# EAGLE board CAA-NMC_variants (EAGLE 9.2.2)
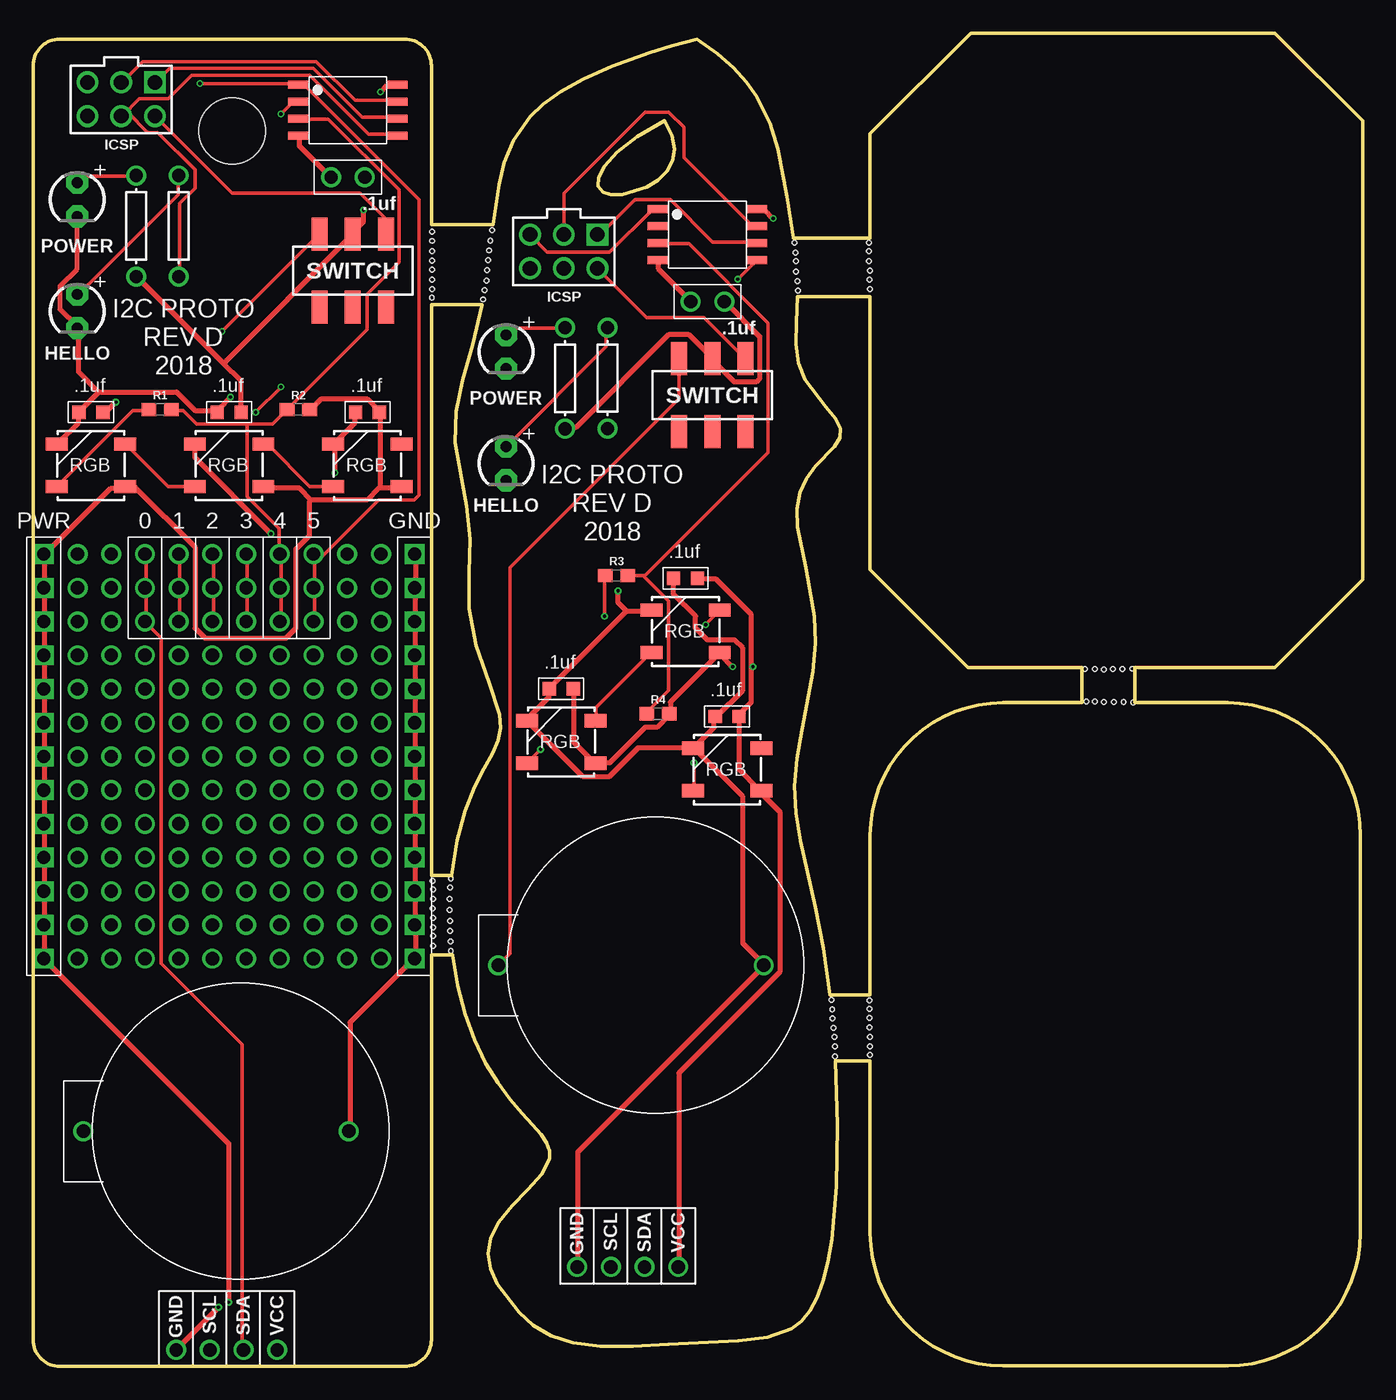
[diagram p0: board, top side]
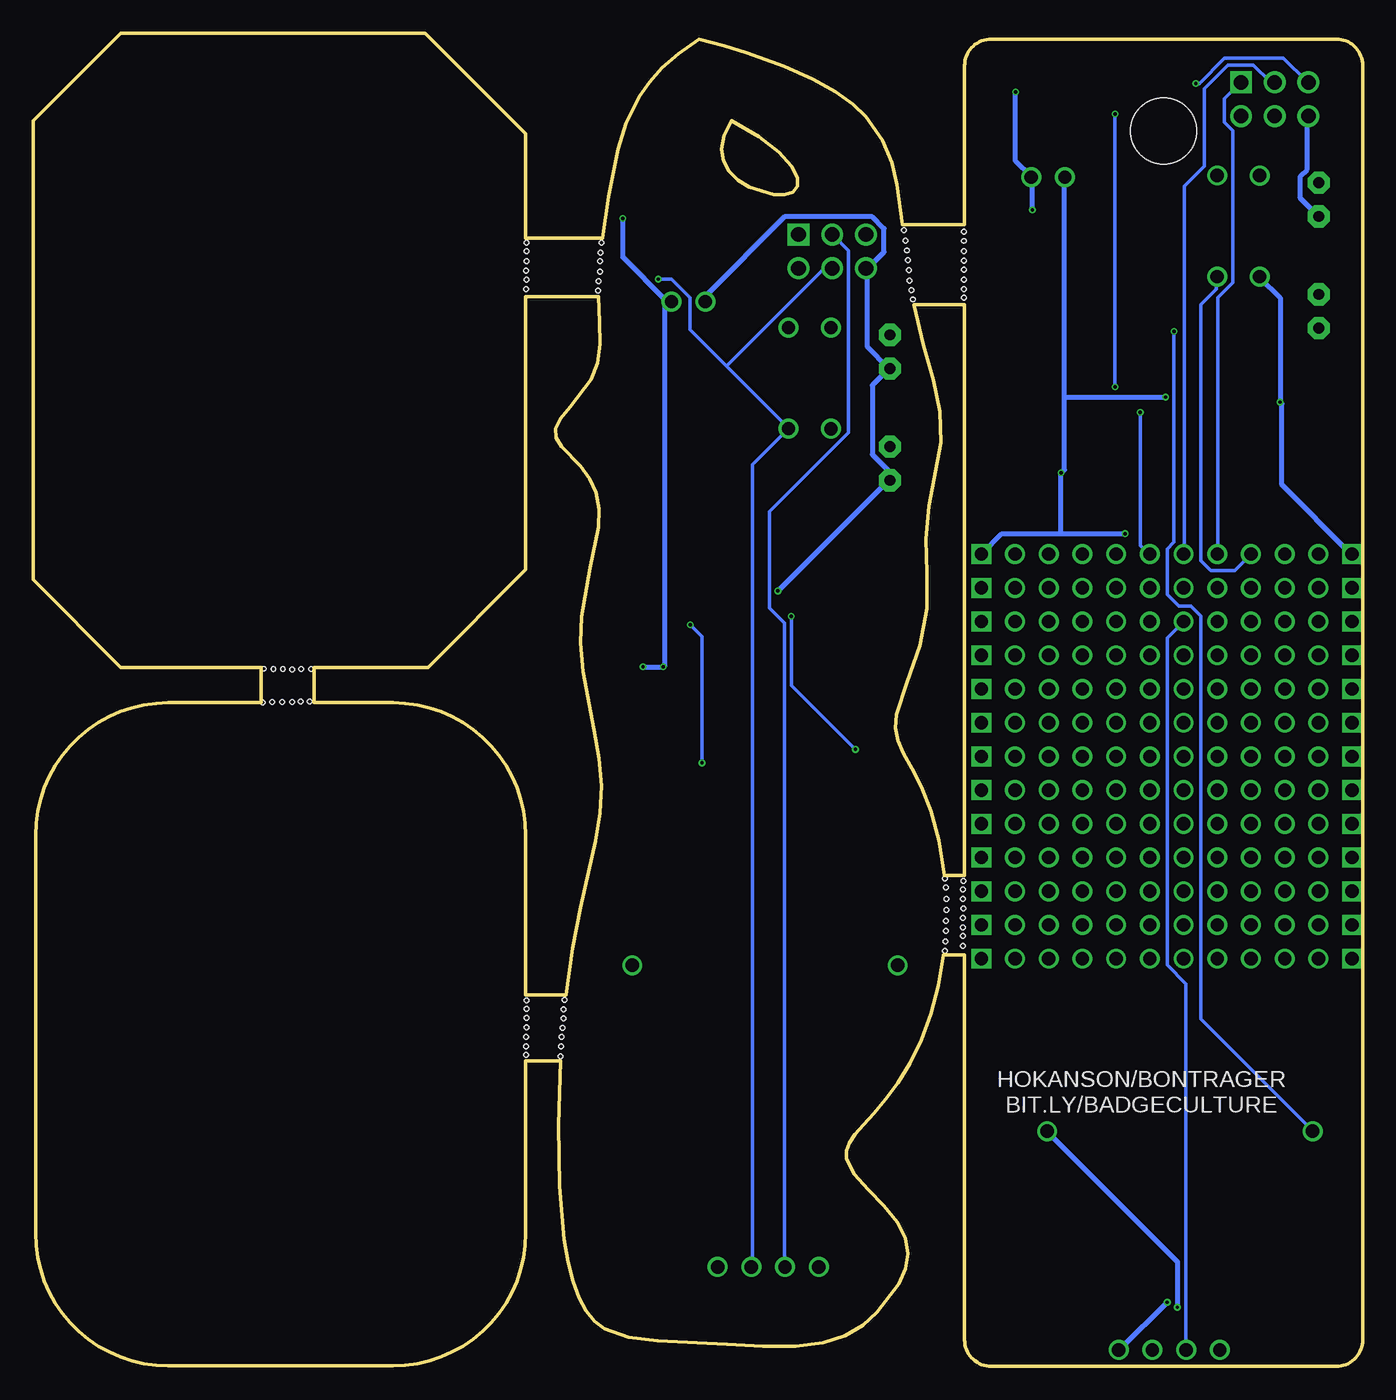
[diagram p1: board, bottom side, seen from below]

Size 100.18 x 100.44 mm. Coordinates in mm from the lower left corner, seen from the top.
Outline: 70.64,100.44 63.06,92.86 63.06,85 57.27,85 56.81,88.12 56.11,91.71 55.5,93.66 54.48,95.71 53.74,96.76 52.78,97.83 51.56,98.91 50,100 48.12,99.48 46.44,98.97 43.62,97.96 41.42,96.98 39.72,96.02 38.42,95.08 37.44,94.16 36.18,92.38 35.49,90.68 35.1,89.05 34.66,86 30,86 30,98 arc90 28,100 2,100 arc90 0,98 0,2 arc90 2,0 28,0 arc90 30,2 30,31 31.61,31 31.98,28.72 32.54,26.56 33.26,24.59 34.1,22.84 35.02,21.35 35.95,20.1 36.84,19.06 37.62,18.2 38.25,17.47 38.69,16.83 38.9,16.24 38.9,15.67 38.33,14.52 37.25,13.31 36.06,12.09 35.08,10.86 34.46,9.66 34.27,8.49 34.46,7.35 34.96,6.22 36.59,4.06 37.67,3.1 39,2.31 40.67,1.78 42.75,1.53 45.2,1.52 47.89,1.65 53.12,1.94 55.33,2.2 57.13,2.85 57.87,3.41 58.52,4.17 59.06,5.17 59.52,6.4 59.88,7.87 60.17,9.57 60.52,13.58 60.6,18.16 60.44,23 63.06,23 63.06,10.03 arc90 73.06,0.03 90,0.03 arc90 100,10.03 100,40 arc90 90,50 83,50 83,52.65 93.57,52.65 100.18,59.26 100.18,93.83 93.57,100.44 70.64,100.44
Outline: 47.55,93.83 48.13,92.71 48.33,91.72 48.18,90.83 47.74,90.05 47.06,89.39 46.22,88.85 44.37,88.27 43.55,88.26 42.92,88.47 42.58,88.9 42.59,89.56 43.04,90.42 43.99,91.46 45.48,92.63 47.55,93.83
Outline: 70.43,52.65 79,52.65 79,50 73.06,50 arc90 63.06,40 63.06,28 60.02,28 59.53,31.49 58.95,34.58 58.35,37.26 57.82,39.59 57.47,41.7 57.37,43.74 57.54,45.81 57.91,47.95 58.74,52.35 58.93,54.49 58.88,56.51 58.23,60.14 57.6,63.24 57.55,64.6 57.77,65.81 58.25,66.89 58.93,67.81 60.37,69.31 60.79,69.98 60.82,70.67 60.44,71.42 59.73,72.27 58.14,74.33 57.66,75.58 57.48,77 57.52,78.66 57.58,80.61 63.06,80.61 63.06,60.02 70.43,52.65
Outline: 30,80 33.81,80 33.09,76.93 32.35,74.29 31.85,71.91 31.8,69.61 32.67,64.8 32.9,62.31 32.83,59.78 32.85,57.11 33.38,54.3 34.36,51.52 35.14,49.12 35.22,48.1 35.04,47.15 34.61,46.17 33.98,45.05 33.26,43.64 32.54,41.85 31.93,39.62 31.53,37 30,37 30,80
Copper layers (1*16): Top 0.035559375mm / dielectric 1.6mm / Bottom 0.035559375mm
Design rules "oshpark-2layer": minimum track width 6mil, minimum drill 10mil, track to track 6mil, track to pad 6mil, pad to pad 6mil, via to via 6mil, smd to smd 6mil, copper to edge 15mil, drill to drill 6mil, minimum pad ring 5mil, minimum via ring 5mil, stop-mask expansion 2.5mil, vias tented up to drill 0mil, thermal gap 10mil
Net classes: 0 default: width 0.254 mm, clearance 0.254 mm; 1 VCC: width 0.381 mm, clearance 0.254 mm; 2 GND: width 0.381 mm, clearance 0.254 mm
Holes 5 mm at 15,93.07
Holes 0.35 mm at 30.07,85.48 30.07,84.79 30.05,84.03 30.07,83.31 30.07,82.63 30.07,81.88 30.05,81.17 30.04,80.51 34.57,85.59 34.44,84.83 34.33,84.08 34.27,83.35 34.19,82.6 34.16,81.79 34.01,81.09 33.89,80.39 30.1,36.58 30.12,35.93 30.12,35.21 30.1,34.5 30.12,33.78 30.12,33.08 30.12,32.41 30.13,31.68 31.47,31.28 31.44,32 31.41,32.81 31.41,33.57 31.37,34.4 31.36,35.23 31.41,36.07 31.47,36.76 60.14,27.59 60.2,26.89 60.22,26.22 60.3,25.51 60.36,24.81 60.41,24.09 60.42,23.36 63,27.58 63,26.92 63,26.25 63.02,25.54 63.05,24.81 63.05,24.12 63.05,23.45 79.34,50.09 80.01,50.09 80.68,50.06 81.41,50.06 82.16,50.04 82.87,50.03 82.81,52.56 82.08,52.54 81.36,52.52 80.68,52.51 79.99,52.52 79.25,52.52 57.35,84.65 57.43,83.92 57.47,83.27 57.48,82.49 57.58,81.75 57.61,81.04 62.99,84.67 62.99,84.01 62.99,83.28 63.03,82.57 63.02,81.87 63.03,81.17

## Footprints (pad centres in the part's own frame; a part is rotated, then mirrored left to right if it is on the bottom)
WS2812B = smd 1 x 1: CAP1 -0.9,4; CAP2 0.9,4 | smd 1.651 x 1: DI -2.577,-1.6; DO 2.577,1.6; GND -2.577,1.6; VCC 2.577,-1.6
LED3MM = drill 0.813 pad 1.676 octagon: NEG 1.27,0; POS -1.27,0
SOT127P798X216-8N = smd 1.5 x 0.6: GND -3.75,-1.905; PB0 3.75,-1.905; PB1 3.75,-0.635; PB2 3.75,0.635; PB3 -3.75,0.635; PB4 -3.75,-0.635; PB5 -3.75,1.905; VCC 3.75,1.905
HDRV6W64P254_2X3_762X508X868P = drill 1.1 pad 1.65: 0/MOSI/SDA 0,1.27; 2/SCK/SCL 0,3.81; 5/RST -2.54,3.81; GND -2.54,1.27; VCC 2.54,1.27 | drill 1.1 pad 1.65 square: 1/MISO 2.54,3.81
0603 = smd 1.1 x 1: 1 -0.85,0; 2 0.85,0
PROTO = drill 1: 0A -6.35,30.48; 0B -6.35,27.94; 0C -6.35,25.4; 1A -3.81,30.48; 1B -3.81,27.94; 1C -3.81,25.4; 2A -1.27,30.48; 2B -1.27,27.94; 2C -1.27,25.4; 3A 1.27,30.48; 3B 1.27,27.94; 3C 1.27,25.4; 4A 3.81,30.48; 4B 3.81,27.94; 4C 3.81,25.4; 5A 6.35,30.48; 5B 6.35,27.94; 5C 6.35,25.4; VSTRIP1 -8.89,22.86; VSTRIP2 -8.89,20.32; VSTRIP3 -8.89,17.78; VSTRIP4 -8.89,15.24; VSTRIP5 -8.89,12.7; VSTRIP6 -6.35,22.86; VSTRIP7 -6.35,20.32; VSTRIP8 -6.35,17.78; VSTRIP9 -6.35,15.24; VSTRIP10 -6.35,12.7; VSTRIP11 -11.43,10.16; VSTRIP12 -11.43,7.62; VSTRIP13 -11.43,5.08; VSTRIP14 -11.43,2.54; VSTRIP15 -11.43,0; VSTRIP16 -3.81,22.86; VSTRIP17 -3.81,20.32; VSTRIP18 -3.81,17.78; VSTRIP19 -3.81,15.24; VSTRIP20 -3.81,12.7; VSTRIP21 -1.27,22.86; VSTRIP22 -1.27,20.32; VSTRIP23 -1.27,17.78; VSTRIP24 -1.27,15.24; VSTRIP25 -1.27,12.7; VSTRIP26 1.27,22.86; VSTRIP27 1.27,20.32; VSTRIP28 1.27,17.78; VSTRIP29 1.27,15.24; VSTRIP30 1.27,12.7; VSTRIP31 3.81,22.86; VSTRIP32 3.81,20.32; VSTRIP33 3.81,17.78; VSTRIP34 3.81,15.24; VSTRIP35 3.81,12.7; VSTRIP36 6.35,22.86; VSTRIP37 6.35,20.32; VSTRIP38 6.35,17.78; VSTRIP39 6.35,15.24; VSTRIP40 6.35,12.7; VSTRIP41 8.89,22.86; VSTRIP42 8.89,20.32; VSTRIP43 8.89,17.78; VSTRIP44 8.89,15.24; VSTRIP45 8.89,12.7; VSTRIP46 11.43,22.86; VSTRIP47 11.43,20.32; VSTRIP48 11.43,17.78; VSTRIP49 11.43,15.24; VSTRIP50 11.43,12.7; VSTRIP51 -11.43,22.86; VSTRIP52 -11.43,20.32; VSTRIP53 -11.43,17.78; VSTRIP54 -11.43,15.24; VSTRIP55 -8.89,10.16; VSTRIP56 -8.89,7.62; VSTRIP57 -8.89,5.08; VSTRIP58 -8.89,2.54; VSTRIP59 -8.89,0; VSTRIP60 -11.43,12.7; VSTRIP61 -8.89,30.48; VSTRIP62 -8.89,27.94; VSTRIP63 -8.89,25.4; VSTRIP64 -11.43,30.48; VSTRIP65 -11.43,27.94; VSTRIP66 -11.43,25.4; VSTRIP67 8.89,30.48; VSTRIP68 8.89,27.94; VSTRIP69 8.89,25.4; VSTRIP70 11.43,30.48; VSTRIP71 11.43,27.94; VSTRIP72 11.43,25.4; VSTRIP75 -6.35,10.16; VSTRIP76 -6.35,7.62; VSTRIP77 -6.35,5.08; VSTRIP78 -6.35,2.54; VSTRIP79 -6.35,0; VSTRIP95 -3.81,10.16; VSTRIP96 -3.81,7.62; VSTRIP97 -3.81,5.08; VSTRIP98 -3.81,2.54; VSTRIP99 -3.81,0; VSTRIP115 -1.27,10.16; VSTRIP116 -1.27,7.62; VSTRIP117 -1.27,5.08; VSTRIP118 -1.27,2.54; VSTRIP119 -1.27,0; VSTRIP135 1.27,10.16; VSTRIP136 1.27,7.62; VSTRIP137 1.27,5.08; VSTRIP138 1.27,2.54; VSTRIP139 1.27,0; VSTRIP155 3.81,10.16; VSTRIP156 3.81,7.62; VSTRIP157 3.81,5.08; VSTRIP158 3.81,2.54; VSTRIP159 3.81,0; VSTRIP175 6.35,10.16; VSTRIP176 6.35,7.62; VSTRIP177 6.35,5.08; VSTRIP178 6.35,2.54; VSTRIP179 6.35,0; VSTRIP195 8.89,10.16; VSTRIP196 8.89,7.62; VSTRIP197 8.89,5.08; VSTRIP198 8.89,2.54; VSTRIP199 8.89,0; VSTRIP215 11.43,10.16; VSTRIP216 11.43,7.62; VSTRIP217 11.43,5.08; VSTRIP218 11.43,2.54; VSTRIP219 11.43,0 | drill 1 square: GND0 13.97,0; GND1 13.97,2.54; GND2 13.97,5.08; GND3 13.97,7.62; GND4 13.97,10.16; GND5 13.97,12.7; GND6 13.97,15.24; GND7 13.97,17.78; GND8 13.97,20.32; GND9 13.97,22.86; GND10 13.97,25.4; GND11 13.97,27.94; GND12 13.97,30.48; PWR0 -13.97,0; PWR1 -13.97,2.54; PWR2 -13.97,5.08; PWR3 -13.97,7.62; PWR4 -13.97,10.16; PWR5 -13.97,12.7; PWR6 -13.97,15.24; PWR7 -13.97,17.78; PWR8 -13.97,20.32; PWR9 -13.97,22.86; PWR10 -13.97,25.4; PWR11 -13.97,27.94; PWR12 -13.97,30.48
THRU-CR-HOLDER = drill 1: GND 8.15,0; VBAT -11.85,0
1X01 = drill 1: P$1 0,0
DECOUPLING_CAP = drill 1: P$1 0,0; P$2 2.54,0
AXIAL-0.3 = drill 1: P$3 -3.81,0; P$4 3.81,0
SMT-SWITCH = smd 1.2 x 2.5: 1 -2.5,-2.75; 2 0,-2.75; 3 2.5,-2.75; 4 -2.5,2.75; 5 0,2.75; 6 2.5,2.75

## Placement (x,y rotation side)
D1  WS2812B  [WS2812B]  4.36,67.89 0 top
D2  WS2812B  [WS2812B]  14.77,67.89 0 top
D3  WS2812B  [WS2812B]  25.19,67.89 0 top
D4  WS2812B  [WS2812B]  39.78,47.05 0 top
D5  WS2812B  [WS2812B]  49.15,55.38 0 top
D6  WS2812B  [WS2812B]  52.28,44.96 0 top
HELLO  LED3MM  [LED3MM]  3.32,79.49 270 top
HELLO1  LED3MM  [LED3MM]  35.62,68.02 270 top
IC1  ATTINY85-20SU  [SOT127P798X216-8N]  23.71,94.64 0 top
IC2  ATTINY85-20SU  [SOT127P798X216-8N]  50.8,85.26 0 top
J1  M20-9980346  [HDRV6W64P254_2X3_762X508X868P]  6.63,92.93 0 top
J2  M20-9980346  [HDRV6W64P254_2X3_762X508X868P]  39.98,81.46 0 top
POWER  LED3MM  [LED3MM]  3.32,87.91 270 top
POWER1  LED3MM  [LED3MM]  35.62,76.44 270 top
R1  470  [0603]  9.56,72.08 0 top
R2  10k  [0603]  19.98,72.08 0 top
R3  470  [0603]  43.95,59.58 0 top
R4  10k  [0603]  47.07,49.16 0 top
U$1  PROTO  [PROTO]  14.77,30.71 0 top
U$3  THRU-CR-HOLDER  [THRU-CR-HOLDER]  15.63,17.71 0 top
U$4  GND  [1X01]  40.99,7.49 180 top
U$5  VCC  [1X01]  48.61,7.49 90 top
U$6  SDA  [1X01]  46.07,7.49 0 top
U$7  SCL  [1X01]  43.53,7.49 0 top
U$8  DECOUPLING_CAP  [DECOUPLING_CAP]  49.53,80.22 0 top
U$9  RESISTOR  [AXIAL-0.3]  40.07,74.45 270 top
U$10  RESISTOR  [AXIAL-0.3]  43.27,74.45 270 top
U$11  SMT-SWITCH  [SMT-SWITCH]  51.17,73.17 0 top
U$14  THRU-CR-HOLDER  [THRU-CR-HOLDER]  46.89,30.22 0 top
U$71  GND  [1X01]  10.77,1.23 180 top
U$72  SDA  [1X01]  15.85,1.23 0 top
U$73  SCL  [1X01]  13.31,1.23 0 top
U$74  VCC  [1X01]  18.39,1.23 90 top
U$123  DECOUPLING_CAP  [DECOUPLING_CAP]  22.44,89.6 0 top
U$126  RESISTOR  [AXIAL-0.3]  7.77,85.91 270 top
U$127  RESISTOR  [AXIAL-0.3]  10.97,85.92 270 top
U$145  SMT-SWITCH  [SMT-SWITCH]  24.08,82.55 0 top

## Library data of the parts
D1-D6 = BadgeParts; PROD_ID: DIO-12503
HELLO HELLO1 POWER POWER1 U$1 U$3-U$11 U$14 U$71-U$74 U$123 U$126 U$127 U$145 = BadgeParts
IC1 IC2 = BadgeParts; ARROW_PART_NUMBER: ATTINY85-20SU; ARROW_PRICE/STOCK: https://www.arrow.com/en/products/attiny85-20su/microchip-technology; DESCRIPTION: MICROCHIP - ATTINY85-20SU - MICROCONTROLLER MCU, 8 BIT, ATTINY, 20MHZ, SOIC-8; HEIGHT: 2.16mm; MANUFACTURER_NAME: Microchip; MANUFACTURER_PART_NUMBER: ATTINY85-20SU; RS_PART_NUMBER: 1331674; RS_PRICE/STOCK: http://uk.rs-online.com/web/p/products/1331674
J1 J2 = BadgeParts; ARROW_PART_NUMBER: M20-9980346; ARROW_PRICE/STOCK: http://uk.rs-online.com/web/p/products/7457046P; DESCRIPTION: 03+03 DIL Vertical Pin Header HARWIN M20 Series, 2.54mm Pitch 6 Way 2 Row Straight PCB Header, Solder Termination, 3A; HEIGHT: 8.68mm; MANUFACTURER_NAME: HARWIN; MANUFACTURER_PART_NUMBER: M20-9980346; RS_PART_NUMBER: 7457046P; RS_PRICE/STOCK: http://uk.rs-online.com/web/p/products/7457046P
R1 R3 = SparkFun-Resistors; PROD_ID: RES-07869
R2 R4 = SparkFun-Resistors; PROD_ID: RES-00824

## Nets
GND [GND]: D1.CAP1 D1.GND D2.CAP1 D2.GND D3.CAP1 D3.GND HELLO.NEG IC1.GND J1.GND POWER.NEG U$1.GND0 U$1.GND1 U$1.GND2 U$1.GND3 U$1.GND4 U$1.GND5 U$1.GND6 U$1.GND7 U$1.GND8 U$1.GND9 U$1.GND10 U$1.GND11 U$1.GND12 U$3.GND U$71.P$1 U$123.P$1
GND1 [GND]: D4.CAP1 D4.GND D5.CAP1 D5.GND D6.CAP1 D6.GND HELLO1.NEG IC2.GND J2.GND POWER1.NEG U$4.P$1 U$8.P$1 U$14.GND
N$1: POWER.POS U$126.P$3
N$2: HELLO.POS U$127.P$3
N$3: D1.DO D2.DI
N$4: D2.DO D3.DI
N$5: D1.DI R1.1
N$6: POWER1.POS U$9.P$3
N$7: HELLO1.POS U$10.P$3
N$8: D4.DO D5.DI
N$9: D5.DO D6.DI
N$10: D4.DI R3.1
PB0: IC1.PB0 J1.0/MOSI/SDA U$1.0A U$1.0B U$1.0C U$72.P$1 U$127.P$4
PB1: IC1.PB1 J1.1/MISO U$1.1A U$1.1B U$1.1C
PB2: IC1.PB2 J1.2/SCK/SCL U$1.2A U$1.2B U$1.2C U$73.P$1
PB3: IC1.PB3 U$1.3A U$1.3B U$1.3C
PB4: IC1.PB4 R1.2 R2.1 U$1.4A U$1.4B U$1.4C
PB5: IC1.PB5 J1.5/RST U$1.5A U$1.5B U$1.5C
PB6: IC2.PB0 J2.0/MOSI/SDA U$6.P$1 U$10.P$4
PB7: IC2.PB3
PB8: IC2.PB4 R3.2 R4.1
PB9: IC2.PB2 J2.2/SCK/SCL U$7.P$1
PB10: IC2.PB5 J2.5/RST
PB11: IC2.PB1 J2.1/MISO
VBAT: U$3.VBAT U$145.4
VBAT1: U$11.4 U$14.VBAT
VCC [VCC]: D1.CAP2 D1.VCC D2.CAP2 D2.VCC D3.CAP2 D3.VCC IC1.VCC R2.2 U$1.PWR0 U$1.PWR1 U$1.PWR2 U$1.PWR3 U$1.PWR4 U$1.PWR5 U$1.PWR6 U$1.PWR7 U$1.PWR8 U$1.PWR9 U$1.PWR10 U$1.PWR11 U$1.PWR12 U$74.P$1 U$123.P$2 U$126.P$4 U$145.5
VCC1 [VCC]: D4.CAP2 D4.VCC D5.CAP2 D5.VCC D6.CAP2 D6.VCC IC2.VCC R4.2 U$5.P$1 U$8.P$2 U$9.P$4 U$11.5
VUSB: J1.VCC U$145.6
VUSB1: J2.VCC U$11.6

## Tracks (layer width: path | path; a pad name or v marks a point on that pad's centre or on a via)
GND  (via drill 0.25)
  Top 0.381: D1.GND 1.91,69.6 3.43,71.12 3.43,71.88 D1.CAP1 3.56,72.01 4.95,73.41 | 4.95,73.41 10.79,73.41 12.19,72.01 13.84,72.01 D2.CAP1 13.97,72.14 v14.86,73.03 | 4.95,73.41 3.43,74.93 3.43,78.11 HELLO.NEG 3.3,78.36 2.03,79.63 2.03,81.41 3.3,82.68 3.3,86.61 POWER.NEG | v13.97,4.45 10.79,1.27 U$71.P$1 | IC1.GND 20.07,92.71 20.07,91.95 22.35,89.66 U$123.P$1 | D3.CAP1 24.26,71.88 24.26,71.12 22.73,69.6 D3.GND 22.73,69.34 v22.73,67.31 | v17.91,62.74 12.19,68.45 12.19,69.47 D2.GND | U$1.GND12 28.83,61.09 28.83,58.8 U$1.GND11 28.83,58.55 28.83,56.26 U$1.GND10 28.83,56.01 28.83,53.72 U$1.GND9 28.83,53.47 28.83,51.18 U$1.GND8 28.83,50.93 28.83,48.64 U$1.GND7 28.83,48.39 28.83,46.1 U$1.GND6 28.83,45.85 28.83,43.56 U$1.GND5 28.83,43.31 28.83,41.02 U$1.GND4 28.83,40.77 28.83,38.48 U$1.GND3 28.83,38.23 28.83,35.94 U$1.GND2 28.83,35.69 28.83,33.4 U$1.GND1 28.83,33.15 28.83,30.73 U$1.GND0 28.57,30.61 23.88,25.91 23.88,17.78 U$3.GND
  Bottom 0.381: J1.GND 4.19,94.11 4.19,90.17 4.7,89.66 4.7,88.01 3.43,86.74 POWER.NEG | v13.97,4.45 13.97,7.87 23.75,17.65 U$3.GND | 22.73,62.74 27.18,62.74 28.7,61.21 U$1.GND12 | 22.73,62.74 v17.91,62.74 | 22.73,62.74 v22.73,67.31 22.48,67.56 22.48,73.03 | 22.48,73.03 22.48,89.53 U$123.P$1 | 22.48,73.03 v14.86,73.03
GND1  (via drill 0.25)
  Top 0.381: IC2.GND 47.12,83.31 47.12,82.68 49.53,80.26 U$8.P$1 | D6.GND 49.78,46.61 51.31,48.13 51.31,48.9 D6.CAP1 51.56,49.02 53.47,50.93 53.47,54.1 52.83,54.74 50.8,54.74 49.91,55.63 49.91,56.52 48.26,58.17 48.26,59.31 D5.CAP1 | 44.7,56.9 46.48,56.9 D5.GND | 44.7,56.9 38.99,51.18 D4.CAP1 38.86,50.93 38.86,50.42 37.21,48.77 D4.GND 37.34,48.51 41.4,44.45 43.43,44.45 45.59,46.61 49.53,46.61 D6.GND | U$4.P$1 41.02,7.49 41.02,16.13 54.99,30.1 U$14.GND 54.99,30.35 53.47,31.88 53.47,42.93 49.91,46.48 D6.GND | v44.07,58.42 44.07,57.53 44.7,56.9
  Bottom 0.381: U$8.P$1 49.53,80.26 49.53,80.64 43.56,86.61 36.96,86.61 36.07,85.72 36.07,83.95 37.21,82.8 J2.GND 37.34,82.68 37.34,76.83 35.69,75.18 POWER1.NEG 35.81,75.06 36.96,73.91 36.96,68.71 35.69,67.44 35.69,66.8 HELLO1.NEG 35.81,66.67 v44.07,58.42
N$1
  Top 0.254: U$126.P$3 7.75,89.66 3.81,89.66 3.43,89.28 POWER.POS
N$2
  Top 0.254: U$127.P$3 10.92,89.66 10.92,88.27 3.43,80.77 HELLO.POS
N$3
  Top 0.254: D2.DI 12.06,66.29 10.16,66.29 6.99,69.47 D1.DO
N$4
  Top 0.254: D3.DI 20.83,66.29 17.65,69.47 17.4,69.47 D2.DO
N$5
  Top 0.254: R1.1 8.64,72.01 7.49,72.01 D1.DI
N$6
  Top 0.254: U$9.P$3 40.01,78.23 36.2,78.23 35.69,77.72 POWER1.POS
N$7
  Top 0.254: U$10.P$3 43.18,78.23 43.18,76.83 35.69,69.34 HELLO1.POS
N$8
  Top 0.254: D4.DO 42.42,48.77 42.42,49.66 46.48,53.72 D5.DI
N$9  (via drill 0.25)
  Top 0.254: v49.78,45.47 49.78,43.43 D6.DI | v50.67,55.88 51.69,56.9 D5.DO
  Bottom 0.254: v49.78,45.47 49.78,54.99 v50.67,55.88
N$10  (via drill 0.25)
  Top 0.254: v43.05,56.52 43.05,59.56 R3.1 | v38.23,46.48 37.21,45.47 D4.DI
  Bottom 0.254: v43.05,56.52 43.05,51.31 v38.23,46.48
PB0
  Top 0.254: IC1.PB0 27.43,92.84 25.27,92.84 20.83,97.28 11.94,97.28 10.16,95.5 8,95.5 6.73,94.23 J1.0/MOSI/SDA 7.11,94.49 8.64,92.96 9.4,92.96 12.19,90.17 12.19,88.77 11.05,87.63 11.05,82.17 U$127.P$4 | U$1.0A 8.51,61.09 8.51,58.67 U$1.0B 8.51,58.55 8.51,56.13 U$1.0C 8.51,56.01 9.65,54.86 9.65,30.35 15.75,24.26 15.75,1.27 U$72.P$1
  Bottom 0.254: U$127.P$4 11.05,82.04 11.05,81.15 12.19,80.01 12.19,60.71 11.43,59.94 9.65,59.94 8.51,61.09 U$1.0A
PB1
  Top 0.254: U$1.1C 11.05,56.13 11.05,58.55 U$1.1B 11.05,58.67 11.05,61.09 U$1.1A | IC1.PB1 27.43,94.11 24.77,94.11 21.08,97.79 10.29,97.79 9.27,96.77 J1.1/MISO
  Bottom 0.254: U$1.1A 10.92,61.21 10.92,80.52 9.78,81.66 9.78,93.09 10.41,93.73 10.41,95.5 9.27,96.65 J1.1/MISO
PB2
  Top 0.254: IC1.PB2 27.43,95.38 24.26,95.38 21.34,98.3 8.26,98.3 6.73,96.77 J1.2/SCK/SCL | U$1.2A 13.59,61.09 13.59,58.67 U$1.2B 13.59,58.55 13.59,56.13 U$1.2C
  Bottom 0.254: U$73.P$1 13.34,1.27 13.34,28.83 14.73,30.23 14.73,54.86 13.59,56.01 U$1.2C | J1.2/SCK/SCL 6.73,96.77 6.99,96.77 8.26,98.04 10.16,98.04 11.94,96.27 11.94,90.42 13.46,88.9 13.46,61.21 U$1.2A
PB3  (via drill 0.25)
  Top 0.254: U$1.3C 16.13,56.13 16.13,58.55 U$1.3B 16.13,58.67 16.13,61.09 U$1.3A | v18.67,94.36 19.56,95.25 19.94,95.25 IC1.PB3 | v16.76,71.88 v18.67,73.79
  Bottom 0.254: v18.67,73.79 v18.67,94.36 | v16.76,71.88 16.76,61.85 16.13,61.21 U$1.3A
PB4
  Top 0.254: U$1.4C 18.67,56.13 18.67,58.55 U$1.4B 18.67,58.67 18.67,61.09 U$1.4A 18.54,61.21 18.54,63.12 16.13,65.53 16.13,70.99 | 16.13,70.99 18.03,70.99 19.05,72.01 R2.1 19.18,72.14 25.15,78.11 25.15,80.77 27.56,83.19 27.56,88.65 22.23,93.98 20.07,93.98 IC1.PB4 | 16.13,70.99 12.32,70.99 11.3,72.01 10.41,72.01 R1.2
PB5  (via drill 0.25)
  Top 0.254: U$1.5C 21.21,56.13 21.21,58.55 U$1.5B 21.21,58.67 21.21,61.09 U$1.5A 21.34,61.09 21.84,61.09 26.04,65.28 28.7,65.28 29.08,65.66 29.08,87.88 20.45,96.52 20.07,96.52 IC1.PB5 19.94,96.65 v12.57,96.65
  Bottom 0.254: v12.57,96.65 12.32,96.65 10.41,98.55 5.97,98.55 4.19,96.77 J1.5/RST
PB6  (via drill 0.25)
  Top 0.254: v53.09,81.92 54.48,83.31 IC2.PB0
  Bottom 0.254: v53.09,81.92 52.07,81.92 50.67,80.52 50.67,78.11 47.94,75.37 | 47.94,75.37 43.31,70.74 U$10.P$4 43.31,70.61 45.97,67.94 45.97,7.49 U$6.P$1 | 47.94,75.37 40.64,82.68 40.01,82.68 J2.0/MOSI/SDA
PB8
  Top 0.254: 46.04,59.5 47.88,57.66 47.88,50.93 46.23,49.28 R4.1 | 46.04,59.5 45.97,59.56 44.83,59.56 R3.2 | 46.04,59.5 55.37,68.83 55.37,78.61 49.4,84.58 47.12,84.58 IC2.PB4
PB9
  Top 0.254: IC2.PB2 54.48,85.98 54.1,85.98 49.02,91.06 49.02,93.34 47.88,94.49 46.1,94.49 40.01,88.39 40.01,85.34 J2.2/SCK/SCL
  Bottom 0.254: U$7.P$1 43.56,7.49 43.56,56.01 44.7,57.15 44.7,64.39 38.73,70.36 38.73,84.07 39.88,85.22 J2.2/SCK/SCL
PB10
  Top 0.254: IC2.PB5 46.99,87.12 46.61,87.12 43.43,83.95 38.73,83.95 37.47,85.22 J2.5/RST
PB11
  Top 0.254: IC2.PB1 54.48,84.71 51.18,84.71 48.01,87.88 45.34,87.88 42.8,85.34 42.55,85.34 J2.1/MISO
VBAT  (via drill 0.25)
  Top 0.254: v14.22,77.98 21.46,85.22 U$145.4
  Bottom 0.254: v14.22,77.98 14.22,62.1 14.73,61.59 14.73,58.17 13.84,57.28 12.95,57.28 12.19,56.52 12.19,26.16 3.81,17.78 U$3.VBAT
VBAT1
  Top 0.254: U$11.4 48.64,75.82 48.64,72.9 35.94,60.2 35.94,31.11 35.05,30.23 U$14.VBAT
VCC  (via drill 0.25)
  Top 0.381: v26.16,96.01 26.67,96.52 27.43,96.52 IC1.VCC | v6.22,72.64 5.59,72.01 5.33,72.01 D1.CAP2 | 14.35,75.56 7.87,82.04 U$126.P$4 | 14.35,75.56 15.62,74.3 15.62,72.01 D2.CAP2 | 14.35,75.56 24,85.22 U$145.5 24.13,85.47 24.89,86.23 v24.89,87.12 | R2.2 20.95,72.14 21.72,72.9 25.15,72.9 26.04,72.01 D3.CAP2 26.16,71.75 26.16,66.29 26.04,66.17 | 20.95,65.28 20.07,66.17 17.4,66.17 D2.VCC | 20.95,65.28 25.15,65.28 26.04,66.17 | 26.04,66.17 27.69,66.17 D3.VCC | v14.73,4.83 14.73,16.76 0.89,30.61 U$1.PWR0 0.89,30.86 0.89,33.15 U$1.PWR1 0.89,33.4 0.89,35.69 U$1.PWR2 0.89,35.94 0.89,38.23 U$1.PWR3 0.89,38.48 0.89,40.77 U$1.PWR4 0.89,41.02 0.89,43.31 U$1.PWR5 0.89,43.56 0.89,45.85 U$1.PWR6 0.89,46.1 0.89,48.39 U$1.PWR7 0.89,48.64 0.89,50.93 U$1.PWR8 0.89,51.18 0.89,53.47 U$1.PWR9 0.89,53.72 0.89,56.01 U$1.PWR10 0.89,56.26 0.89,58.55 U$1.PWR11 0.89,58.8 0.89,61.09 U$1.PWR12 0.89,61.21 5.84,66.17 6.86,66.17 D1.VCC 7.11,66.29 7.62,66.29 12.19,61.72 12.19,55.63 12.95,54.86 19.05,54.86 19.81,55.63 19.81,61.59 20.83,62.61 20.83,65.15 20.95,65.28
  Bottom 0.381: v26.16,96.01 26.16,90.81 25.02,89.66 U$123.P$2 24.89,89.53 v24.89,87.12 | U$126.P$4 7.75,82.04 6.22,80.52 v6.22,72.64 6.1,72.52 6.1,66.42 0.89,61.21 U$1.PWR12 | v14.73,4.83 18.29,1.27 U$74.P$1
VCC1  (via drill 0.25)
  Top 0.381: v55.75,86.49 55.12,87.12 54.61,87.12 IC2.VCC | U$8.P$2 52.2,80.14 54.74,77.6 54.74,74.42 54.48,74.17 52.83,74.17 51.18,75.82 U$11.5 51.05,76.07 49.4,77.72 47.88,77.72 40.89,70.74 40.13,70.74 U$9.P$4 | D4.CAP2 40.77,50.93 40.77,46.99 42.29,45.47 D4.VCC 42.55,45.47 43.43,45.47 46.1,48.13 46.99,48.13 47.88,49.02 R4.2 48.01,49.28 48.01,50.04 51.69,53.72 D5.VCC 51.82,53.59 v52.7,52.7 | 54.1,52.7 54.1,50.04 53.21,49.15 D6.CAP2 53.21,48.9 53.21,44.96 54.74,43.43 D6.VCC 54.86,43.18 56.26,41.78 56.26,29.72 48.64,22.1 48.64,7.49 U$5.P$1 | 54.1,52.7 54.1,56.64 51.44,59.31 50.16,59.31 D5.CAP2 | v54.23,52.7 54.1,52.7
  Bottom 0.381: v55.75,86.49 55.75,83.57 52.45,80.26 52.2,80.26 U$8.P$2 52.58,80.14 52.58,52.83 v52.7,52.7 v54.23,52.7
VUSB
  Top 0.254: U$145.6 26.54,85.34 26.54,86.49 24.64,88.39 14.99,88.39 9.27,94.11 J1.VCC
VUSB1
  Top 0.254: U$11.6 53.59,75.95 50.55,78.99 46.23,78.99 42.55,82.68 J2.VCC

## Text on the board
tPlace: .1uf | POWER | I2C PROTO / REV D / 2018 | .1uf | HELLO | POWER | HELLO | I2C PROTO / REV D / 2018 | GND | SCL | SDA | VCC | GND | SCL | SDA | VCC
bPlace: HOKANSON/BONTRAGER / BIT.LY/BADGECULTURE